# Allegro board K149H09_B1.2.brd
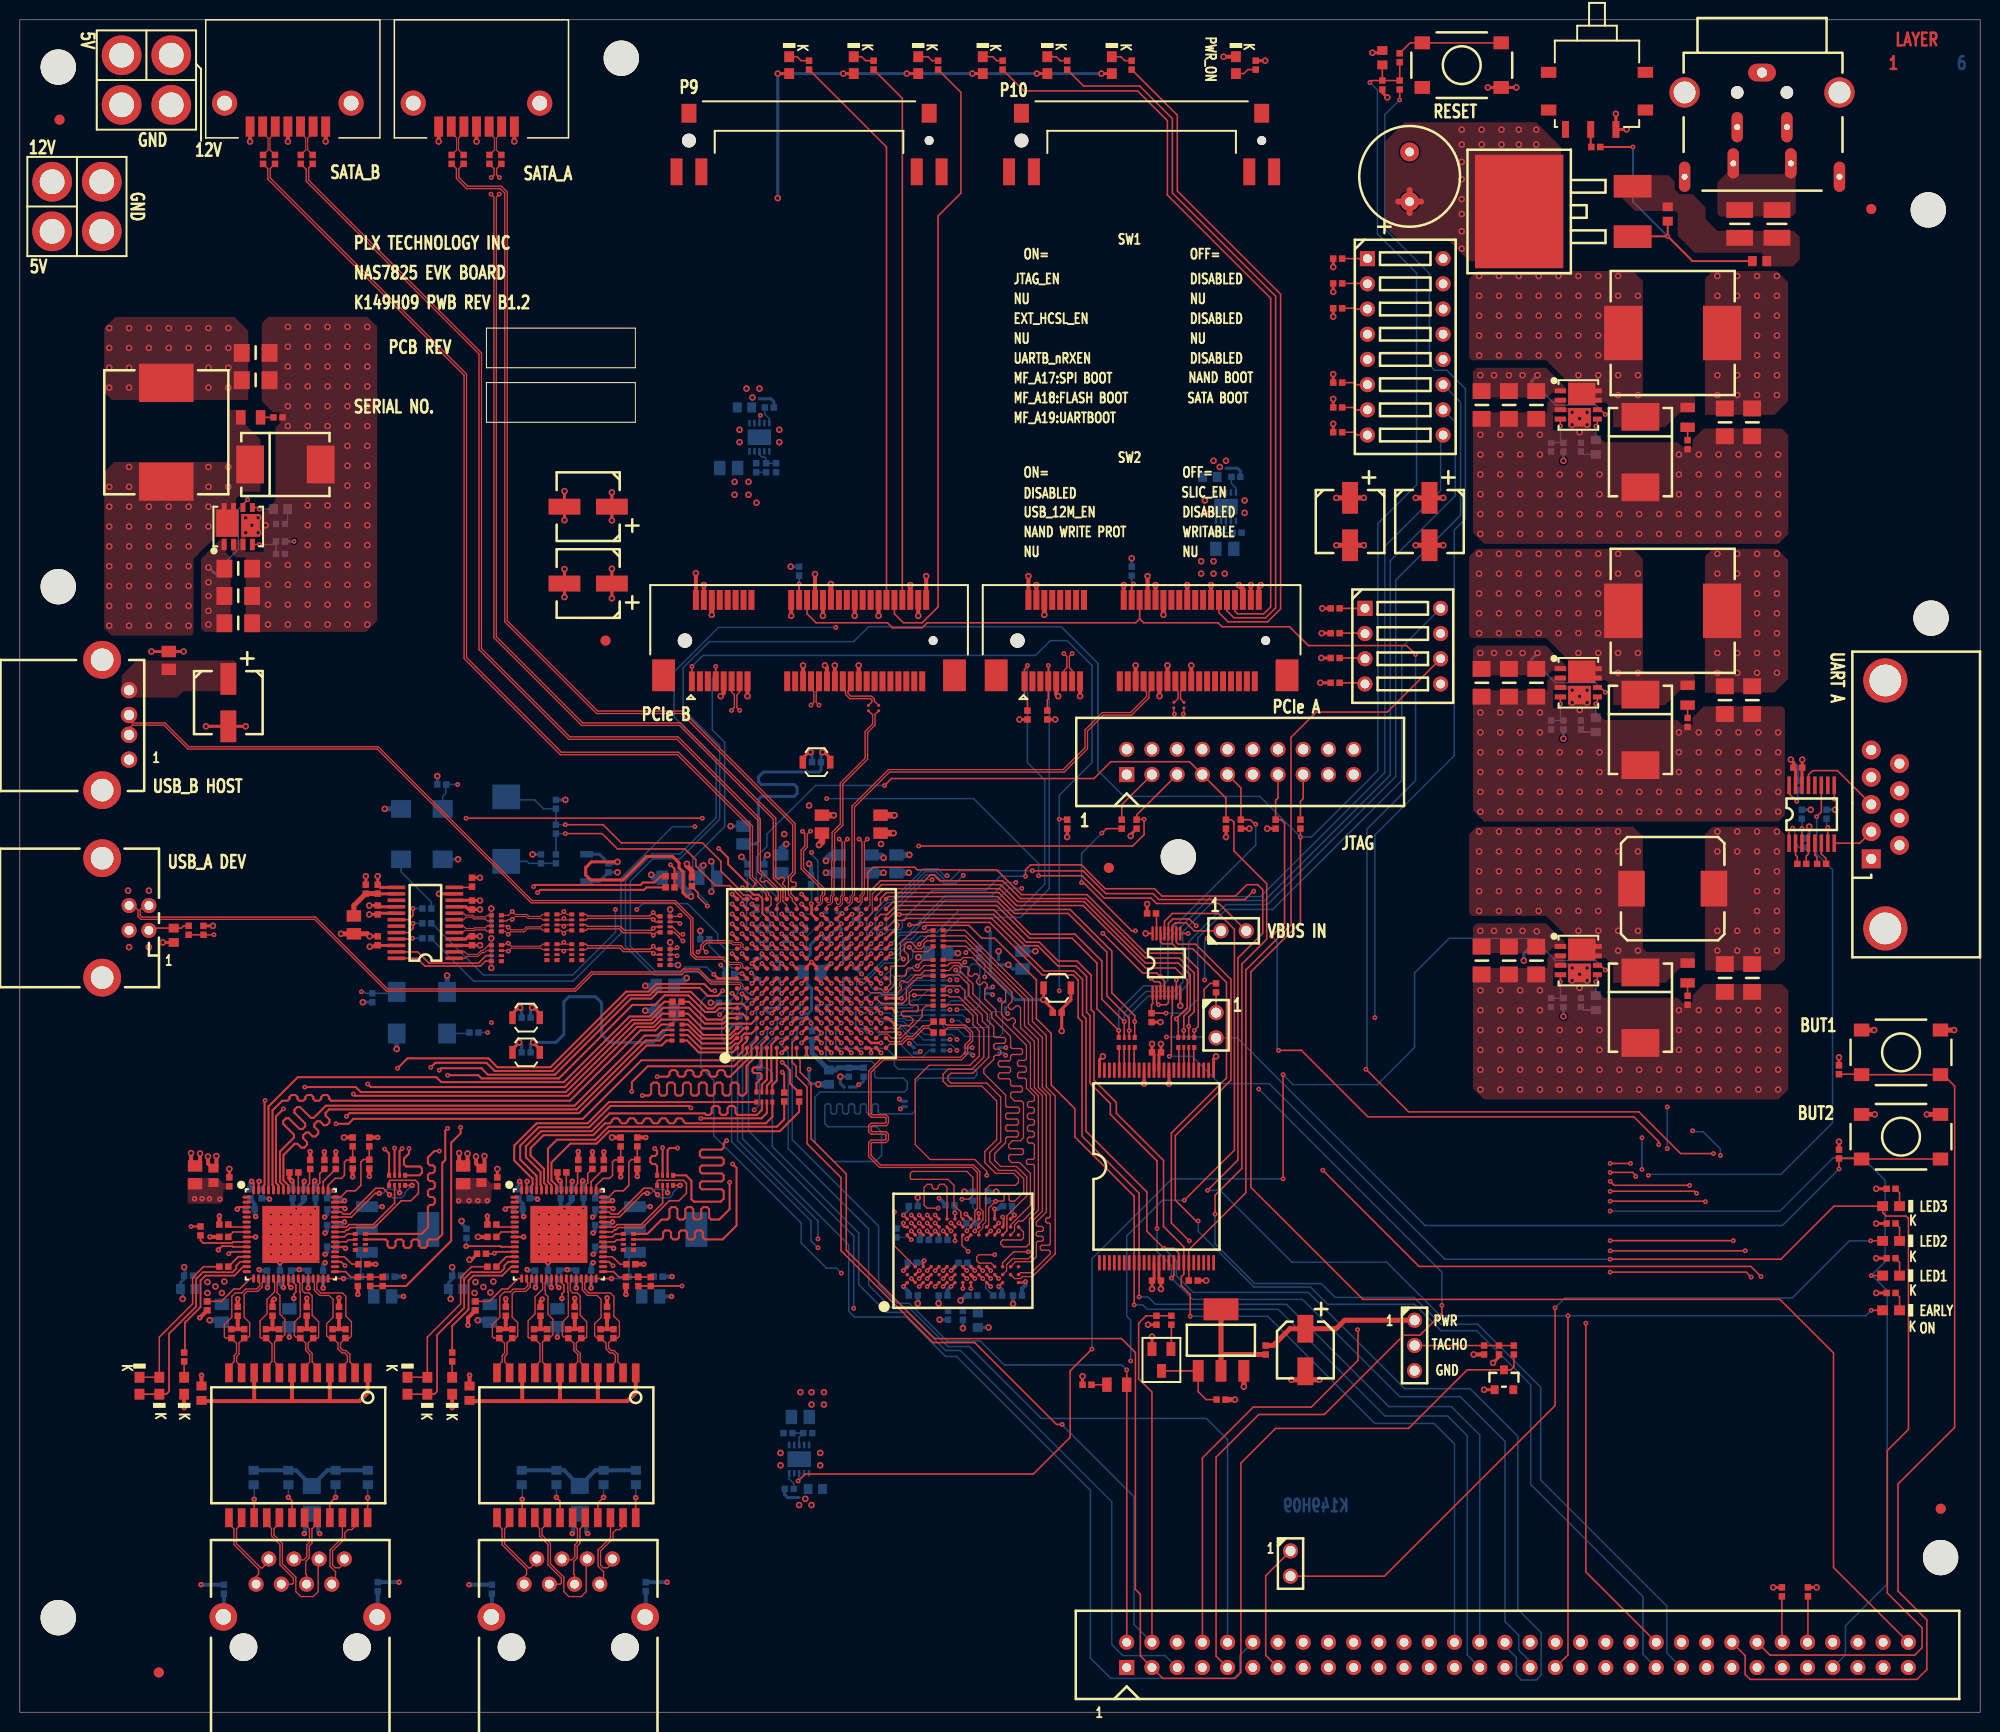
[diagram p0: board, top side]
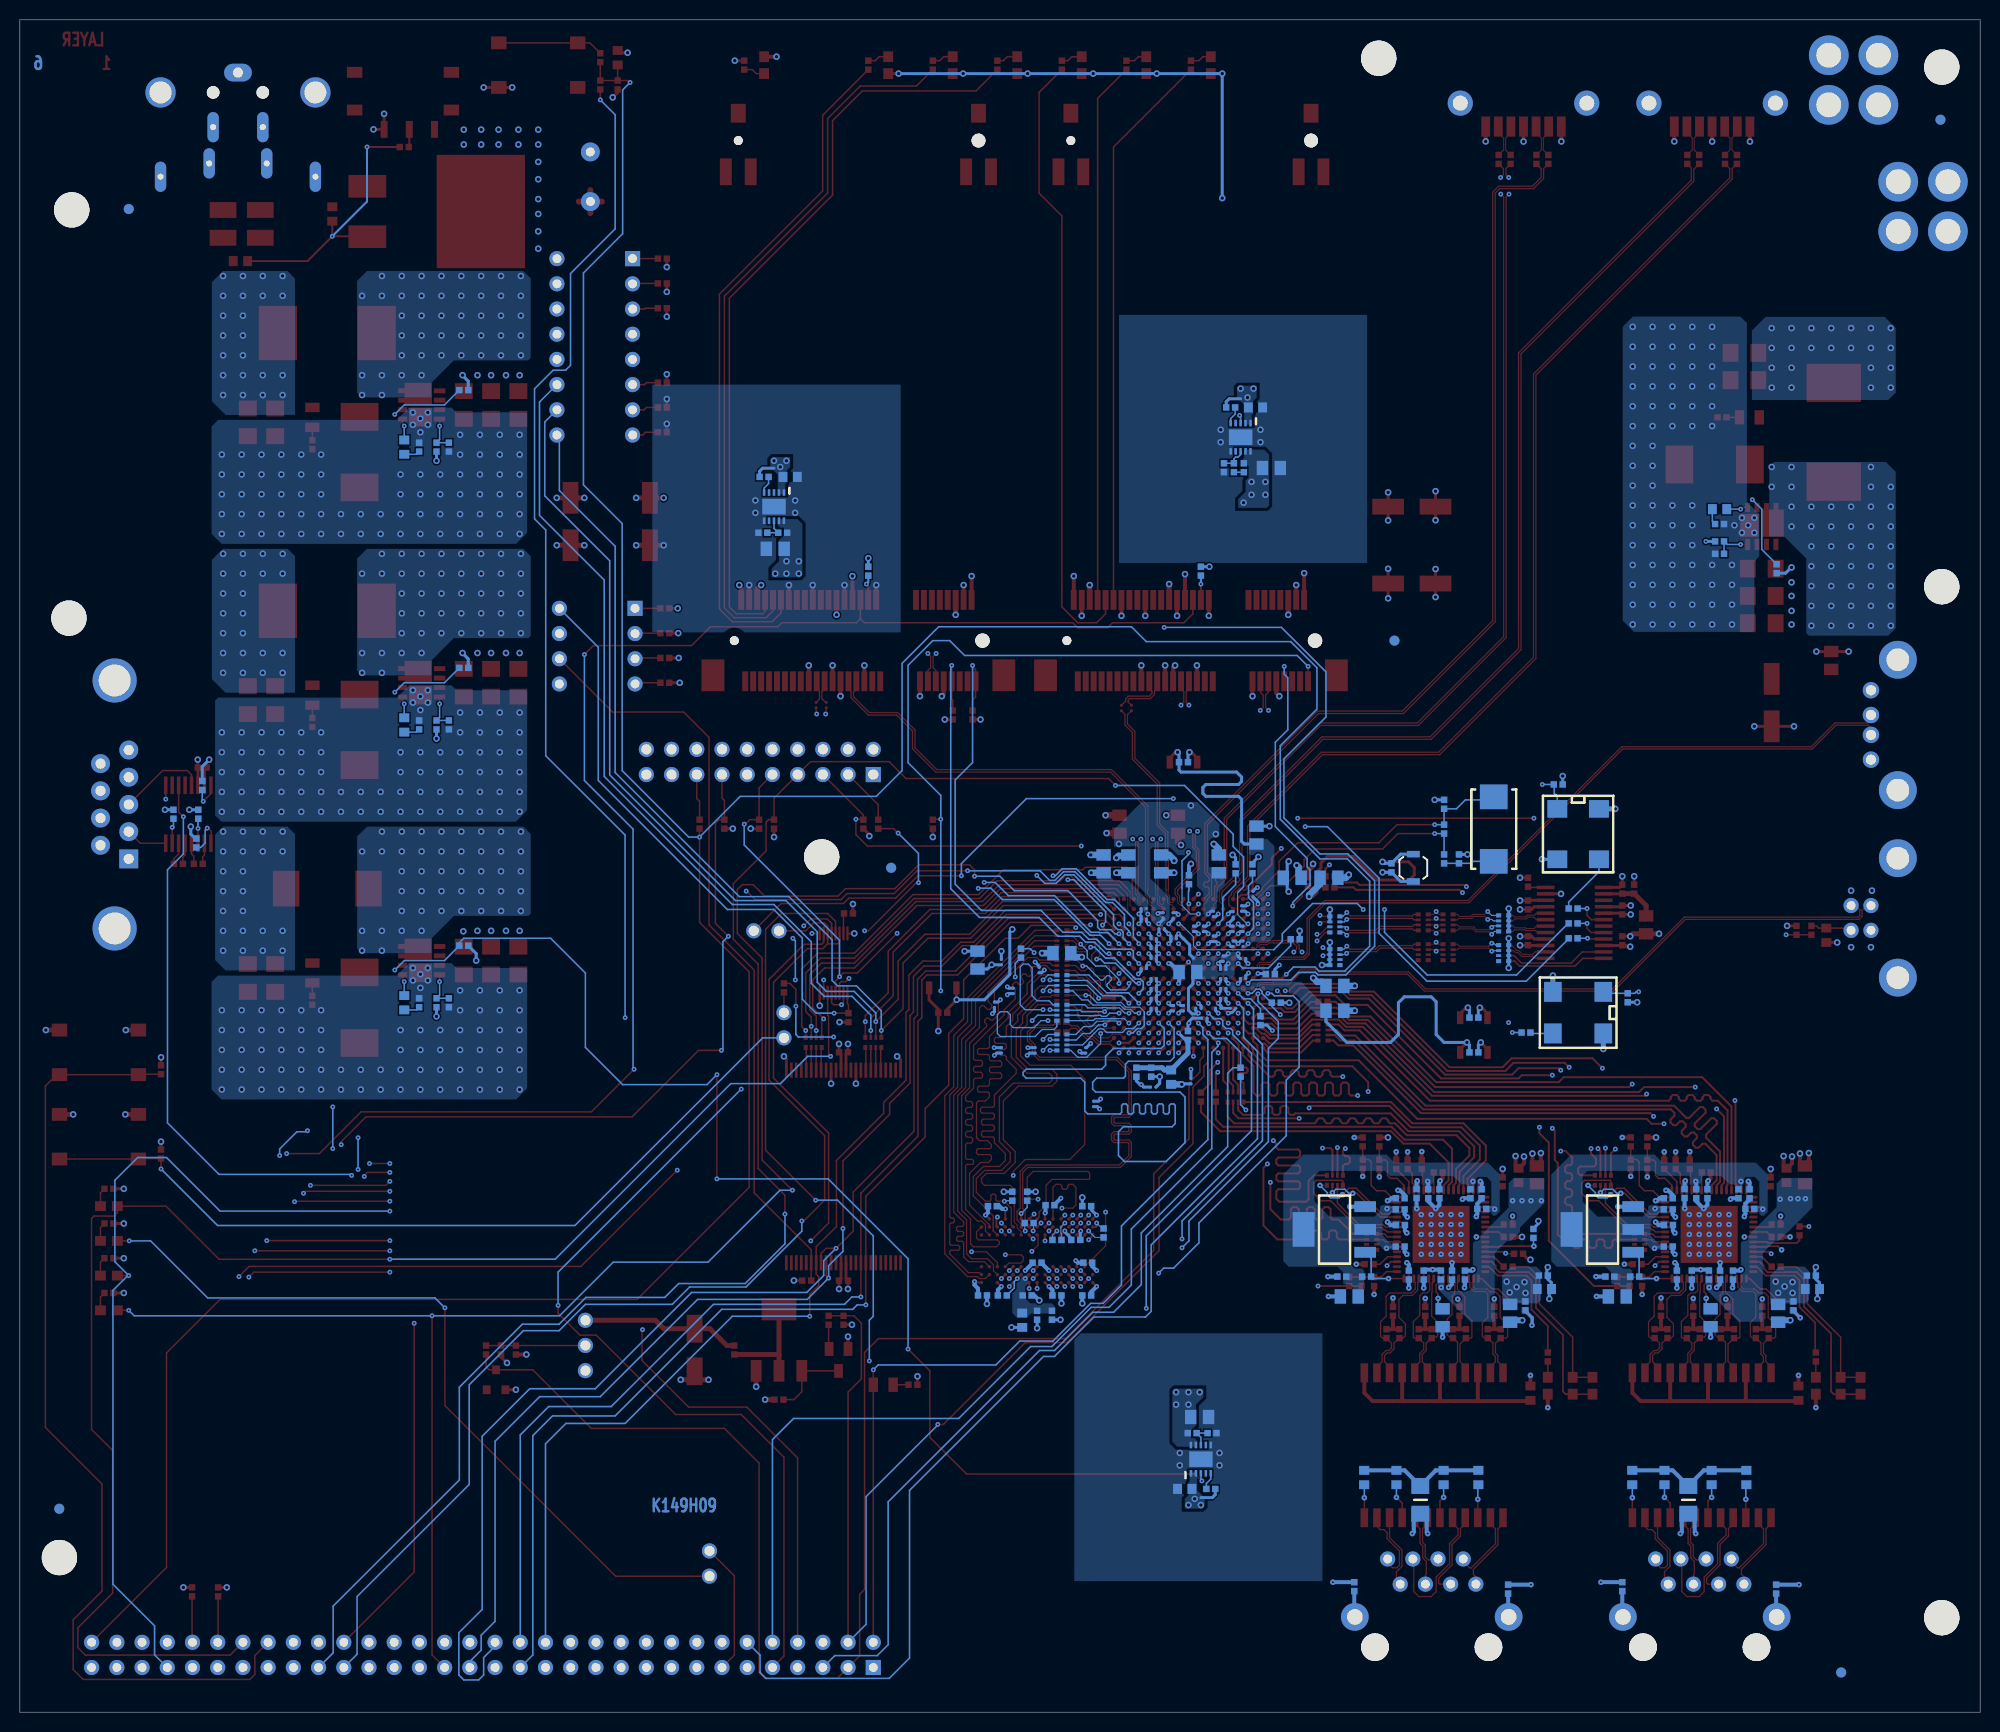
[diagram p1: board, bottom side, seen from below]

Outline 197.47 x 170.57 mm; copper layers: TOP, GNDPLANE-2, INNER-3, INNER-4, PWRPLANE-5, BOTTOM. Coordinates in mm from the lower left corner of the outline.
Outline path: 0,170.57 0,0 197.47,0 197.47,170.57 0,170.57

## Design rules (mm)
net group BMF_A5: nets BMF_A5 MF_A5
net group BMF_A11: nets BMF_A11 MF_A11
net group CLOCK_TO_STROBES: nets DDR2_NDQS0 DDR2_NDQS1
net group DDR2_A0: nets DDR2_A0 OXMEM_A0
net group DDR2_A1: nets DDR2_A1 OXMEM_A1
net group DDR2_A2: nets DDR2_A2 OXMEM_A2
net group DDR2_A3: nets DDR2_A3 OXMEM_A3
net group DDR2_A4: nets DDR2_A4 OXMEM_A4
net group DDR2_A5: nets DDR2_A5 OXMEM_A5
net group DDR2_A6: nets DDR2_A6 OXMEM_A6
net group DDR2_A7: nets DDR2_A7 OXMEM_A7
net group DDR2_A8: nets DDR2_A8 OXMEM_A8
net group DDR2_A9: nets DDR2_A9 OXMEM_A9
net group DDR2_A10: nets DDR2_A10 OXMEM_A10
net group DDR2_A11: nets DDR2_A11 OXMEM_A11
net group DDR2_A12: nets DDR2_A12 OXMEM_A12
net group DDR2_A13: nets DDR2_A13 OXMEM_A13
net group DDR2_BA0: nets DDR2_BA0 OXMEM_BA0
net group DDR2_BA1: nets DDR2_BA1 OXMEM_BA1
net group DDR2_BA2: nets DDR2_BA2 OXMEM_BA2
net group DDR2_CASN: nets DDR2_CASN OXMEM_CASN
net group DDR2_CK: nets DDR2_CK OXMEM_CK
net group DDR2_CKB: nets DDR2_CKB OXMEM_CKB
net group DDR2_CKE: nets DDR2_CKE OXMEM_CKE
net group DDR2_CSN: nets DDR2_CSN OXMEM_CSN
net group DDR2_ODT: nets DDR2_ODT OXMEM_ODT
net group DDR2_RASN: nets DDR2_RASN OXMEM_RASN
net group DDR2_WEN: nets DDR2_WEN OXMEM_WEN
net group DIFFPAIR0: nets PAIR0+_23232053 PAIR0-_23232050
net group DIFFPAIR1: nets PAIR1+_23232042 PAIR1-_23232040
net group DIFFPAIR2: nets PAIR2+_23232047 PAIR2-_23232046
net group DIFFPAIR3: nets PAIR3+_23232045 PAIR3-_23232044
net group DIFFPAIR4: nets CHANNEL_A+_23231895 CHANNEL_A-_23231897
net group DIFFPAIR5: nets CHANNEL_B+_23231809 CHANNEL_B-_23231722
net group DIFFPAIR6: nets CHANNEL_C+_23231861 CHANNEL_C-_23231857
net group DIFFPAIR7: nets CHANNEL_D+_23231823 CHANNEL_D-_23231810
net group DIFFPAIR8: nets PAIR0+ PAIR0-
net group DIFFPAIR9: nets PAIR1+ PAIR1-
net group DIFFPAIR10: nets PAIR2+ PAIR2-
net group DIFFPAIR11: nets PAIR3+ PAIR3-
net group DIFFPAIR12: nets CHANNEL_A+ CHANNEL_A-
net group DIFFPAIR13: nets CHANNEL_B+ CHANNEL_B-
net group DIFFPAIR14: nets CHANNEL_C+ CHANNEL_C-
net group DIFFPAIR15: nets CHANNEL_D+ CHANNEL_D-
net group DP_B_D: nets B_DM B_DP
net group DP_DA_D: nets DA_DM DA_DP
net group DP_PCIEA_PER: nets PCIEA_PERN0 PCIEA_PERP0
net group DP_PCIEB_PER: nets PCIEB_PERN0 PCIEB_PERP0
net group ETHA_25MHZ: nets ETHA_25MHZ N23439733
net group ETHA_TX_CTL: nets ETHA_TX_CTL N23439684
net group ETHA_TXC: nets ETHA_TXC N23439675
net group ETHA_TXD0: nets ETHA_TXD0 N23439882
net group ETHA_TXD1: nets ETHA_TXD1 N23439652
net group ETHA_TXD2: nets ETHA_TXD2 N23439663
net group ETHA_TXD3: nets ETHA_TXD3 N23439650
net group ETHB_TX_CTL: nets ETHB_TX_CTL N23439856
net group ETHB_TXC: nets ETHB_TXC N23439858
net group ETHB_TXD0: nets ETHB_TXD0 N23439641
net group ETHB_TXD1: nets ETHB_TXD1 N23439865
net group ETHB_TXD2: nets ETHB_TXD2 N23439863
net group ETHB_TXD3: nets ETHB_TXD3 N23439773
net group FAN_PWM: nets FAN_PWM N18234665
net group JTAG_NRST: nets JTAG_NRST N18750792
net group MDC: nets MDC MF_A3
net group N17700745: nets N17700745 N17765390
net group N17950406: nets N17950406 N17964845
net group N18234653: nets N18234653 N18234812
net group N19900220: nets N19900220 N19900222
net group N19900256: nets N19900256 N19900276
net group N140914361: nets N14091584 N140914361
net group N140916121: nets N14091668 N140916121
net group N140916441: nets N14091676 N140916441
net group N140959561: nets N14096104 N140959561
net group N140961321: nets N14096188 N140961321
net group N140961641: nets N14096196 N140961641
net group NAND_D0: nets N23258188 NAND_D0
net group NAND_D1: nets N23258192 NAND_D1
net group NAND_D2: nets N23258196 NAND_D2
net group NAND_D3: nets N23258202 NAND_D3
net group NAND_D4: nets N23258208 NAND_D4
net group NAND_D5: nets N23258218 NAND_D5
net group NAND_D6: nets N23258220 NAND_D6
net group NAND_D7: nets N23258029 NAND_D7
net group NRESET: nets N18750702 NRESET
net group PCIE_VDD3V3: nets N14091310 N14095822
net group PCIEA_PETN0: nets N13968763 PCIEA_PETN0
net group PCIEA_PETP0: nets N13968767 PCIEA_PETP0
net group PCIEB_PETN0: nets N13959877 PCIEB_PETN0
net group PCIEB_PETP0: nets N13964281 PCIEB_PETP0
net group RXN0: nets N17820092 RXN0
net group RXN1: nets N17820013 RXN1
net group RXP0: nets N17820094 RXP0
net group RXP1: nets N17820015 RXP1
net group TXN0: nets N17820090 TXN0
net group TXN1: nets N17820011 TXN1
net group TXP0: nets N17820088 TXP0
net group TXP1: nets N17820009 TXP1
net group VBUS_IN: nets N17671158 VBUS_IN
net group N13931481: nets N13931481 N14036210 N14092670 N17923256 N22858587
net group N13931745: nets N13931745 N14036589 N14092678 N17923258 N22856740
net group N18247031: nets N18247031 N18247049 N18252801
net group PCIEA_REFCLKN: nets N14041873 N14092662 N17923346 N22853060 PCIEA_REFCLKN
net group PCIEA_REFCLKP: nets N14041486 N14048913 N17923344 N22853977 PCIEA_REFCLKP
net group PCIEB_REFCLKN: nets N14041101 N14092658 N17923342 N22854896 PCIEB_REFCLKN
net group PCIEB_REFCLKP: nets N14040718 N14092674 N17923328 N22855817 PCIEB_REFCLKP
net group RPD_DDR_DQ_H: nets DDR2_DM1 DDR2_DQ8 DDR2_DQ9 DDR2_DQ10 DDR2_DQ11 DDR2_DQ12 DDR2_DQ13 DDR2_DQ14 DDR2_DQ15 DDR2_PDQS1
net group RPD_DDR_DQ_L: nets DDR2_DM0 DDR2_DQ0 DDR2_DQ1 DDR2_DQ2 DDR2_DQ3 DDR2_DQ4 DDR2_DQ5 DDR2_DQ6 DDR2_DQ7 DDR2_PDQS0
net group RPD_ETHA: nets ETHA_RX_CTL ETHA_RXC ETHA_RXD0 ETHA_RXD1 ETHA_RXD2 ETHA_RXD3
net group RPD_ETHB: nets ETHB_RX_CTL ETHB_RXC ETHB_RXD0 ETHB_RXD1 ETHB_RXD2 ETHB_RXD3
net group USB_VDD2V5_F: nets USB_VDD2V5_F

## Placement (name value [footprint] x y rotation side)
C1  CAP_CER_0805  [L2051]  65 73.2 180 bottom
C2  CAP_CER_0201_round  [L2058]  74.25 73.95 0 bottom
C3  CAP_CER_0805  [L2051]  65.6 84.1 180 bottom
C4  CAP_CER_0201_round  [L2058]  75.25 80.4 90 bottom
C5  CAP_CER_0201_round  [L2058]  76.25 73.95 180 bottom
C6  CAP_CER_0805  [L2051]  88.3 85.5 90 bottom
C7  CAP_CER_0201_round  [L2058]  84.25 81 180 bottom
C8  CAP_CER_0805  [L2051]  65 70.7 180 bottom
C9  CAP_CER_0201_round  [L2058]  76.25 74.85 180 bottom
C10  CAP_CER_0201_round  [L2058]  84.25 79.95 180 bottom
C11  CAP_CER_0201_round  [L2058]  78.25 78.95 90 bottom
C12  CAP_CER_0201_round  [L2058]  81.3 80.3 270 bottom
C13  CAP_CER_0201_round  [L2058]  74.25 75.95 0 bottom
C14  CAP_CER_0201_round  [L2058]  75.25 78.95 270 bottom
C15  CAP_CER_0201_round  [L2058]  75.25 70.95 180 bottom
C16  CAP_CER_0201_round  [L2058]  76.25 72.95 180 bottom
C17  CAP_CER_0201_round  [L2058]  76.25 75.95 90 bottom
C18  CAP_CER_0201_round  [L2058]  77.25 77.95 90 bottom
C19  CAP_CER_0201_round  [L2058]  83.25 72.95 0 bottom
C20  CAP_CER_0201_round  [L2058]  82.45 78.95 0 bottom
C21  CAP_CER_0201_round  [L2058]  81.25 77.95 180 bottom
C22  CAP_CER_0201_round  [L2058]  83.25 76.95 0 bottom
C23  CAP_CER_0201_round  [L2058]  84.25 74.95 180 bottom
C24  CAP_CER_0201_round  [L2058]  81.25 70.95 270 bottom
C25  CAP_CER_0201_round  [L2058]  78.75 70.95 0 bottom
C26  CAP_CER_0201_round  [L2058]  73.25 82.45 270 bottom
C27  CAP_CER_0201_round  [L2058]  74.25 77.45 270 bottom
C30  CAP_CER_0201_round  [L2058]  75.25 77.45 270 bottom
C31  CAP_CER_0201_round  [L2058]  74.25 78.95 90 bottom
C32  CAP_CER_0201_round  [L2058]  74.4 81 90 bottom
C33  CAP_CER_0201_round  [L2058]  76.25 71.95 180 bottom
C34  CAP_CER_0201_round  [L2058]  79.25 78.95 90 bottom
C35  CAP_CER_0201_round  [L2058]  83.25 77.95 0 bottom
C36  CAP_CER_0201_round  [L2058]  83.25 75.95 0 bottom
C37  CAP_CER_0201_round  [L2058]  76.75 70.95 0 bottom
C38  CAP_CER_0201_round  [L2058]  77.25 80.45 90 bottom
C39  CAP_CER_0201_round  [L2058]  82.3 80.3 270 bottom
C40  CAP_CER_0201_round  [L2058]  78.15 69.95 180 bottom
C41  CAP_CER_0201_round  [L2058]  83.25 73.95 0 bottom
C42  CAP_CER_0201_round  [L2058]  83.25 71.95 0 bottom
C43  CAP_CER_0201_round  [L2058]  83.25 70.95 180 bottom
C44  CAP_CER_0201_round  [L2058]  80.25 70.95 270 bottom
C45  CAP_CER_0201_round  [L2058]  116.24 101.5 90 top
C46  CAP_CER_0201_round  [L2058]  117.26 101.5 90 top
C47  CAP_CER_0201_round  [L2058]  85.49 101.2 90 top
C48  CAP_CER_0201_round  [L2058]  86.51 101.2 90 top
C49  CAP_CER_0805  [L2051]  33.65 79.35 90 top
C50  CAP_CER_0402s  [L1077C]  36.05 82.95 270 top
C51  CAP_CER_0402s  [L1077C]  36.05 80.85 270 top
C52  CAP_CER_0402s  [L1077C]  45.55 77.75 90 top
C53  CAP_CER_0402s  [L1077C]  45.55 81.35 90 top
C56  CAP_CER_0603s  [L2050C]  15.5 78.3 90 top
C60  CAP_CER_0402s  [L1077C]  43.5 156.5 90 top
C61  CAP_CER_0402s  [L1077C]  44.7 156.5 90 top
C62  CAP_CER_0402s  [L1077C]  47.3 156.5 90 top
C63  CAP_CER_0402s  [L1077C]  48.5 156.5 90 top
C64  CAP_CER_0402s  [L1077C]  25.7 156.5 90 top
C65  CAP_CER_0402s  [L1077C]  24.5 156.5 90 top
C66  CAP_CER_0402s  [L1077C]  29.5 156.5 90 top
C67  CAP_CER_0402s  [L1077C]  28.3 156.5 90 top
C68  CAP_CER_0402s  [L1077C]  95 45.3 180 bottom
C69  CAP_CER_0402s  [L1077C]  90 51 180 bottom
C70  CAP_CER_0402s  [L1077C]  99.5 51 180 bottom
C71  CAP_CER_0402s  [L1077C]  93.7 51.1 0 bottom
C72  CAP_CER_0402s  [L1077C]  91.1 47.6 180 bottom
C73  CAP_CER_0402s  [L1077C]  89.9 45.3 0 bottom
C74  CAP_CER_0402s  [L1077C]  93 42 0 bottom
C75  CAP_CER_0402s  [L1077C]  90 42 180 bottom
C76  CAP_CER_0402s  [L1077C]  100.5 42 0 bottom
C77  CAP_CER_0402s  [L1077C]  96 42 0 bottom
C78  CAP_CER_0603s  [L2050C]  96.5 39.5 90 bottom
C79  CAP_CER_0402s  [L1077C]  79.8 68.2 270 bottom
C80  CAP_CER_0603s  [L2050C]  81.5 64 90 bottom
C82  CAP_CER_0402s  [L1077C]  54 91.5 270 bottom
C83  CAP_CER_0402s  [L1077C]  52.5 86 270 bottom
C85  CAP_CER_0402s  [L1077C]  114.5 43.5 180 top
C86  CAP_CER_0402s  [L1077C]  114.5 66.5 180 top
C88  CAP_POL__SMT_PANASONIC_CASE_C  [L2124]  129.5 36.5 270 top
C91  CAP_CER_0402s  [L1077C]  107.5 33 0 top
C95  CAP_CER_0402s  [L1077C]  179.1 95.2 180 top
C96  CAP_CER_0402s  [L1077C]  179.5 85.5 0 top
C97  CAP_CER_0402s  [L1077C]  179.5 90.5 270 bottom
C98  CAP_CER_0402s  [L1077C]  182 90.5 270 bottom
C99  CAP_CER_0402s  [L1077C]  181.5 85.5 0 top
C102  CAP_CER_0603s  [L2050C]  158.75 127.5 90 bottom
C111  0805  [L2051]  71.4 125.4 0 bottom
C114  CAP_CER_0603s  [L2050C]  73 131.5 0 bottom
C117  0805  [L2051]  78.62 29.75 0 bottom
C119  CAP_CER_0603s  [L2050C]  80.12 22.5 180 bottom
C122  CAP_CER_0805  [L2051]  82.5 85.5 90 bottom
C123  CAP_CER_0805  [L2051]  92.5 76.5 0 bottom
C124  CAP_CER_0805  [L2051]  76.7 85.5 90 bottom
C125  CAP_CER_0805  [L2051]  85.8 85.5 90 bottom
C126  CAP_CER_0603s  [L2050C]  137.25 166.75 270 top
C127  CAP_CER_0402s  [L1077C]  36.05 77.75 270 top
C128  CAP_CER_0805  [L2051]  72.9 88.4 90 bottom
C129  CAP_CER_0805  [L2051]  69.3 84.1 180 bottom
C130  CAP_CER_0805  [L2051]  80.8 89.5 90 top
C131  CAP_CER_0805  [L2051]  86.7 89.5 270 top
C132  CAP_CER_0805  [L2051]  101 75.8 90 bottom
C133  CAP_CER_0805  [L2051]  79.8 74.6 0 bottom
C134  CAP_CER_0201_round  [L2058]  79.5 63.6 90 bottom
C135  CAP_CER_0201_round  [L2058]  90.1 66.7 270 bottom
C136  CAP_CER_0201_round  [L2058]  98.6 66.7 90 bottom
C137  CAP_CER_0201_round  [L2058]  83.3 63 0 bottom
C138  CAP_CER_0201_round  [L2058]  94.8 74.8 270 bottom
C139  CAP_CER_0201_round  [L2058]  97.4 72.7 90 bottom
C140  CAP_CER_0201_round  [L2058]  95.2 66.7 90 bottom
C141  CAP_CER_0201_round  [L2058]  98.6 75.6 270 bottom
C142  CAP_CER_0201_round  [L2058]  89.3 61.3 90 bottom
C143  CAP_CER_0201_round  [L2058]  99.3 71.3 90 bottom
C144  CAP_CER_0402s  [L1077C]  36.55 43.4 270 top
C145  CAP_CER_0402s  [L1077C]  32.15 40.4 90 top
C146  CAP_CER_0402s  [L1077C]  28.9 40.4 90 top
C147  CAP_CER_0805  [L2051]  27.15 39.75 90 bottom
C148  CAP_CER_0402s  [L1077C]  20.55 12.4 270 bottom
C149  CAP_CER_0402s  [L1077C]  36.05 12.65 270 bottom
C150  CAP_CER_1206  [L2052]  29.4 21.4 90 bottom
C151  CAP_CER_0402s  [L1077C]  21.95 40.4 270 top
C152  CAP_CER_0402s  [L1077C]  25.45 40.4 270 top
C153  CAP_CER_0402s  [L1077C]  31.43 46.92 0 bottom
C154  CAP_CER_0402s  [L1077C]  31.43 50.67 0 bottom
C155  CAP_CER_0402s  [L1077C]  28.6 52.25 90 bottom
C156  CAP_CER_0402s  [L1077C]  24.35 52.25 90 bottom
C157  CAP_CER_0402s  [L1077C]  23.2 50.73 180 bottom
C158  CAP_CER_0402s  [L1077C]  34.8 43.9 180 bottom
C159  CAP_CER_0402s  [L1077C]  31.4 49.1 0 bottom
C160  CAP_CER_0402s  [L1077C]  31.43 51.8 0 bottom
C161  CAP_CER_0402s  [L1077C]  29.77 52.27 90 bottom
C162  CAP_CER_0402s  [L1077C]  27.48 52.25 90 bottom
C163  CAP_CER_0402s  [L1077C]  23.23 52.25 90 bottom
C164  CAP_CER_0805  [L2051]  36.55 41.9 180 bottom
C165  CAP_CER_0402s  [L1077C]  37.3 43.9 180 bottom
C166  CAP_CER_0402s  [L1077C]  30.55 44.05 270 bottom
C167  CAP_CER_0402s  [L1077C]  29.05 44.05 270 bottom
C168  CAP_CER_0402s  [L1077C]  26.2 44.05 270 bottom
C169  CAP_CER_0402s  [L1077C]  24.9 44.05 270 bottom
C170  CAP_CER_0402s  [L1077C]  27.32 44.05 270 bottom
C171  CAP_CER_0805  [L2051]  17.65 54.15 90 top
C172  CAP_CER_0805  [L2051]  20.35 40.2 90 bottom
C173  CAP_CER_0402s  [L1077C]  18.8 40.95 90 bottom
C174  CAP_CER_0402s  [L1077C]  63.55 43.4 270 top
C175  CAP_CER_0402s  [L1077C]  59.15 40.4 90 top
C176  CAP_CER_0402s  [L1077C]  55.9 40.4 90 top
C177  CAP_CER_0805  [L2051]  54.15 39.75 90 bottom
C178  CAP_CER_0402s  [L1077C]  47.55 12.4 270 bottom
C179  CAP_CER_0402s  [L1077C]  63.05 12.65 270 bottom
C180  CAP_CER_1206  [L2052]  56.4 21.4 90 bottom
C181  CAP_CER_0402s  [L1077C]  48.95 40.4 270 top
C182  CAP_CER_0402s  [L1077C]  52.45 40.4 270 top
C183  CAP_CER_0402s  [L1077C]  58.42 46.92 0 bottom
C184  CAP_CER_0402s  [L1077C]  58.42 50.67 0 bottom
C185  CAP_CER_0402s  [L1077C]  55.6 52.25 90 bottom
C186  CAP_CER_0402s  [L1077C]  51.35 52.25 90 bottom
C187  CAP_CER_0402s  [L1077C]  50.2 50.73 180 bottom
C188  CAP_CER_0402s  [L1077C]  61.8 43.9 180 bottom
C189  CAP_CER_0805  [L2051]  63.55 41.9 180 bottom
C190  CAP_CER_0402s  [L1077C]  64.3 43.9 180 bottom
C191  CAP_CER_0402s  [L1077C]  58.4 49.1 0 bottom
C192  CAP_CER_0402s  [L1077C]  58.42 51.8 0 bottom
C193  CAP_CER_0402s  [L1077C]  56.77 52.27 90 bottom
C194  CAP_CER_0402s  [L1077C]  54.48 52.25 90 bottom
C195  CAP_CER_0402s  [L1077C]  50.23 52.25 90 bottom
C196  CAP_CER_0805  [L2051]  44.65 54.15 90 top
C197  CAP_CER_0402s  [L1077C]  57.55 44.05 270 bottom
C198  CAP_CER_0402s  [L1077C]  56.05 44.05 270 bottom
C199  CAP_CER_0402s  [L1077C]  53.2 44.05 270 bottom
C200  CAP_CER_0402s  [L1077C]  51.9 44.05 270 bottom
C201  CAP_CER_0402s  [L1077C]  54.33 44.05 270 bottom
C202  CAP_CER_0805  [L2051]  47.35 40.2 90 bottom
C203  CAP_CER_0402s  [L1077C]  45.8 40.95 90 bottom
C204  D8 Case  [L2117A]  142 120 270 top
C205  D8 Case  [L2117A]  134 120 270 top
C206  D8 Case  [L2117A]  57.25 121.5 180 top
C207  D8 Case  [L2117A]  57.25 113.75 180 top
C208  CAP_POL_SMT_PANASONIC_HC_D8  [L2117A]  21 101.75 270 top
C209  CAP_CER_0603s  [L2050C]  175.25 146.25 0 top
C210  1206  [L2052]  147.25 103.75 90 top
C211  1206  [L2052]  150 103.75 90 top
C212  1206  [L2052]  152.75 103.75 90 top
C213  CAP_POL_RAD_PD100LP050LD06  [L2120A]  140 152.25 90 top
C214  1206  [L2052]  171.75 102 90 top
C215  1206  [L2052]  174.5 102 90 top
C216  CAP_CER_0603s  [L2050C]  158.75 99.5 90 bottom
C217  1206  [L2052]  22 109.75 180 top
C218  1206  [L2052]  22 112.5 180 top
C219  1206  [L2052]  22 115.25 180 top
C220  1206  [L2052]  147.25 75.75 90 top
C221  1206  [L2052]  150 75.75 90 top
C222  1206  [L2052]  152.75 75.75 90 top
C223  1206  [L2052]  23.75 134.25 180 top
C224  1206  [L2052]  23.75 137 180 top
C225  1206  [L2052]  171.75 74 90 top
C226  1206  [L2052]  174.5 74 90 top
C227  CAP_CER_0603s  [L2050C]  26.25 121.25 180 bottom
C228  CAP_CER_0603s  [L2050C]  158.75 71.5 90 bottom
C229  1206  [L2052]  147.25 131.75 90 top
C230  1206  [L2052]  150 131.75 90 top
C231  1206  [L2052]  152.75 131.75 90 top
C232  1206  [L2052]  171.75 130 90 top
C233  1206  [L2052]  174.5 130 90 top
C234  0805  [L2051]  121.38 117.25 180 bottom
C235  CAP_CER_0603s  [L2050C]  119.88 124.5 0 bottom
C236  CAP_CER_0402s  [L1077C]  168 99.75 90 top
C237  CAP_CER_0402s  [L1077C]  26 130.5 180 top
C238  CAP_CER_0402s  [L1077C]  168 71.75 90 top
C239  CAP_CER_0402s  [L1077C]  168 127.75 90 top
CONN1  SATA_STD_Molex_67490_1220  [L7473RA]  46 159.81 180 top
CONN2  SATA_STD_Molex_67490_1220  [L7473RA]  27 159.81 180 top
D1  LED_CHIP_SMT_0603_KP1608  [L3631C]  77.5 166 90 top
D2  LED_CHIP_SMT_0603_KP1608  [L3631C]  84 166 90 top
D3  LED_CHIP_SMT_0603_KP1608  [L3631C]  90.5 166 90 top
D4  LED_CHIP_SMT_0603_KP1608  [L3631C]  97 166 90 top
D5  LED_CHIP_SMT_0603_KP1608  [L3631C]  103.5 166 90 top
D6  LED_CHIP_SMT_0603_KP1608  [L3631C]  110 166 90 top
D9  LED_CHIP_SMT_0603_KP1608  [L3631C]  188.5 40.5 0 top
D10  LED_CHIP_SMT_0603_KP1608  [L3631C]  188.5 44 0 top
D11  LED_CHIP_SMT_0603_KP1608  [L3631C]  188.5 47.5 0 top
D12  LED_CHIP_SMT_0603_KP1608  [L3631C]  188.5 51 0 top
D13  LED_CHIP_SMT_0603_KP1608  [L3631C]  122.5 166 90 top
D14  BZX84C3V3_SOT23  [L3790G]  149.5 33.5 180 top
D15  LED_CHIP_SMT_0603_KP1608  [L3631C]  16.55 32.9 270 top
D16  LED_CHIP_SMT_0603_KP1608  [L3631C]  12.05 32.9 90 top
D17  LED_CHIP_SMT_0603_KP1608  [L3631C]  14.05 32.9 270 top
D18  LED_CHIP_SMT_0603_KP1608  [L3631C]  43.55 32.9 270 top
D19  LED_CHIP_SMT_0603_KP1608  [L3631C]  39.05 32.9 90 top
D20  LED_CHIP_SMT_0603_KP1608  [L3631C]  41.05 32.9 270 top
D21  5A 40V -SMC  [L3552D]  163.25 99 270 top
D22  5A 40V -SMC  [L3552D]  26.75 125.75 0 top
D23  5A 40V -SMC  [L3552D]  163.25 71 270 top
D24  5A 40V -SMC  [L3552D]  163.25 127 270 top
F1  Fuse  [L2051]  15 106 270 top
FB1  FERRITE_SMT_0603  [L4598]  18.3 32.15 270 top
FB2  FERRITE_SMT_0603  [L4598]  19.5 54.1 270 top
FB3  FERRITE_SMT_0603  [L4598]  16.9 42.65 0 bottom
FB4  FERRITE_SMT_0603  [L4598]  45.3 32.15 270 top
FB5  FERRITE_SMT_0603  [L4598]  46.5 54.1 270 top
FB6  FERRITE_SMT_0603  [L4598]  43.9 42.65 180 bottom
FID1  -  [ALS_FID]  4 160.5 0 top
FID2  -  [ALS_FID]  186.5 151.5 0 top
FID3  -  [ALS_FID]  14 4 0 top
FID4  -  [ALS_FID]  193.5 20.5 0 top
FID5  -  [ALS_FID]  109.7 85.1 0 top
FID6  -  [ALS_FID]  59 108 0 top
FID7  -  [ALS_FID]  59 108 180 bottom
FID8  -  [ALS_FID]  109.7 85.1 180 bottom
FID9  -  [ALS_FID]  193.5 20.5 180 bottom
FID10  -  [ALS_FID]  14 4 180 bottom
FID11  -  [ALS_FID]  186.5 151.5 180 bottom
FID12  -  [ALS_FID]  4 160.5 180 bottom
HD3  2.54mm 32x2 Header strip  [L8079A]  111.5 4.5 0 top
HD4  FAN TACHO  [L8019]  140.5 39.5 0 top
HD5  Header 10x2 TH Shrouded  [L8072A]  111.5 94.5 0 top
HD6  Kycon_KPJX_4S_S_PowerConn  [L7651A]  173 159.75 180 top
IC1  NAS7825  [L0414]  79.75 74.45 0 top
IC2  ICS841S04I  [L0563]  40.85 79.55 90 top
IC5  DDR2_2Gb_16Mx16x8_84FBGA  [L0363C]  95 46.5 90 top
IC7  SN74CB3T3257  [L0808]  115.5 75.5 0 top
IC11  MT29F1G08AACWP  [L0571]  114.5 55 0 top
IC15  ISL83220ECVZ  [L0598]  180.5 90.5 0 top
IC16  IP1001  [L0680E]  27.3 48.15 0 top
IC17  IP1001  [L0680E]  54.3 48.15 0 top
IC18  AOZ1014D  [L0107]  157 103.75 270 top
IC19  AOZ1014D  [L0107]  22 119.5 0 top
IC20  AOZ1014D  [L0107]  157 75.75 270 top
IC21  AOZ1014D  [L0107]  157 131.75 270 top
IC22  AP7165  [L0873]  74.5 128.5 270 bottom
IC23  AP7167  [L0873]  78.5 25.5 90 bottom
IC24  AP7167  [L0873]  121.5 121.5 270 bottom
JP1  JUMPER  [L8014]  121 78.75 90 top
JP2  JUMPER  [L8014]  128 16.25 0 top
JP3  JUMPER  [L8014]  120.5 70.5 0 top
L1  IND_WURTH_WE_TPC_T  [L4878]  104.5 73 270 top
L2  IND_WURTH_WE_TPC_T  [L4878]  51 70 90 top
L3  IND_WURTH_WE_TPC_T  [L4878]  57.1 85.1 0 bottom
L4  IND_WURTH_WE_TPC_T  [L4878]  51 66.5 90 top
L5  IND_WURTH_WE_TPC_T  [L4878]  80.25 95.75 90 top
L6  IND_COILTRONICS_DR127  [L4824]  166.5 111 0 top
L7  IND_COILTRONICS_DR127  [L4824]  14.75 129 90 top
L8  IND_SMT_EPCOS_B82464Z4xxxx  [L4819]  166.5 83 180 top
L9  IND_COILTRONICS_DR127  [L4824]  166.5 139 0 top
MAG1  H5007  [L4139]  28.05 26.9 180 top
MAG2  H5007  [L4139]  55.05 26.9 180 top
NOREF  -  [unnamed]  192.25 151.41 0 top
NOREF#2  -  [#2]  0 0 90 top
NOREF#3  -  [unnamed]  60.59 166.7 0 top
NOREF#4  -  [#2]  242.25 -63.25 0 top
NOREF#5  -  [#2]  0 0 0 top
NOREF#6  -  [unnamed]  116.7 86.2 0 top
NOREF#7  -  [unnamed]  3.87 9.52 0 top
NOREF#8  -  [#2]  10 20 90 top
NOREF#9  -  [#2]  187.2 -7.6 0 top
NOREF#10  -  [#2]  0 0 90 top
NOREF#11  -  [unnamed#3]  113 158.4 0 top
NOREF#12  -  [unnamed]  3.87 165.81 0 top
NOREF#13  -  [unnamed]  193.49 15.58 0 top
NOREF#14  -  [#2]  0 0 0 top
NOREF#15  -  [#2]  65 -45.5 0 top
NOREF#16  -  [#2]  -101.9 -108.9 0 top
NOREF#17  -  [#2]  211.3 171.3 0 top
NOREF#18  -  [#2]  15.5 -7.3 0 top
NOREF#19  -  [unnamed]  3.87 113.44 0 top
NOREF#20  -  [unnamed]  192.53 110.27 0 top
NOREF#21  -  [#2]  14.5 179.5 0 top
NOREF#22  -  [unnamed#3]  79.5 158.4 0 top
NOREF#23  -  [#2]  10 20 0 top
OSC1  7mmx5mmosc_b  [L3008]  40.5 88.5 270 bottom
OSC2  7mmx5mmosc_b  [L3008]  40.5 70.5 0 bottom
P1  PCI_EXPRESS_MINI_x1  [L8961G]  79.5 108 0 top
P2  PCI_EXPRESS_MINI_x1  [L8961G]  113 108 0 top
P3  USB type B  [L8294]  13 78.8 0 top
P5  USB type A  [L8794S]  11 103 270 top
P7  DSUB9 - M - US  [L8133A]  186.5 86 90 top
P11  3012S  [L7003D1]  23.8 12.9 0 top
P12  3012S  [L7003D1]  50.8 12.9 0 top
PWR1  Power Lead  [L9659]  15.25 167 180 top
PWR2  Power Lead  [L9659]  3.25 154.25 270 top
R1  Res_0402  [L1077C]  51 70 0 bottom
R2  Res_0402  [L1077C]  59.3 85.1 90 bottom
R3  Res_0402  [L1077C]  104.5 70.5 180 top
R4  Res_0402  [L1077C]  51 66.5 0 bottom
R5  Res_0402  [L1077C]  65.5 84.25 180 top
R6  Res_0402  [L1077C]  66.2 70.4 180 top
R7  Res_0402  [L1077C]  66.2 71.6 180 top
R8  Res_0402  [L1077C]  78.5 62 270 top
R9  Res_0402  [L1077C]  77 62 270 top
R10  Res_0402  [L1077C]  79.7 83.9 270 bottom
R11  Res_0402  [L1077C]  86 166 90 top
R12  Res_0402  [L1077C]  92.5 166 90 top
R13  Res_0402  [L1077C]  79.5 166 90 top
R14  Res_0402  [L1077C]  78.5 115 90 bottom
R15  Res_0402  [L1077C]  73.3 85 270 bottom
R16  Res_0402  [L1077C]  112 166 90 top
R17  Res_0402  [L1077C]  112 115 90 bottom
R18  Res_0402  [L1077C]  41 81 180 bottom
R19  Res_0402  [L1077C]  99 166 90 top
R20  Res_0402  [L1077C]  105.5 166 90 top
R21  Res_0402  [L1077C]  42.5 93.5 0 bottom
R22  Res_0402  [L1077C]  45.55 83.65 270 top
R25  Res_0402  [L1077C]  70.9 71.5 180 bottom
R26  Res_0402  [L1077C]  45.75 68.5 0 bottom
R31  Res_0402  [L1077C]  17 78.8 90 top
R32  Res_0402  [L1077C]  35.5 72 90 bottom
R33  Res_0402  [L1077C]  18.5 78.8 270 top
R34  Res_0402  [L1077C]  72.5 69.7 90 bottom
R35  Res_0402  [L1077C]  69 77.9 0 bottom
R36  Res_0402  [L1077C]  75 85 270 bottom
R37  Res_0402  [L1077C]  95.8 49.3 180 bottom
R38  Res_0402  [L1077C]  97.5 52 270 bottom
R39  Res_0402  [L1077C]  88.3 48.3 270 bottom
R40  Res_0402  [L1077C]  93 47.6 180 bottom
R41  Res_0402  [L1077C]  96 52 90 bottom
R42  Res_0402  [L1077C]  92.5 68.5 0 top
R43  Res_0402  [L1077C]  92.5 69.6 0 top
R44  Res_0402  [L1077C]  95 40 270 bottom
R45  Res_0402  [L1077C]  85 64.5 270 bottom
R46  Res_0402  [L1077C]  93.5 40 90 bottom
R47  Res_0402  [L1077C]  83.5 64.5 90 bottom
R48  Res_0402  [L1077C]  103.5 100.5 90 top
R49  Res_0402  [L1077C]  101.5 100.5 90 top
R50  Res_0402  [L1077C]  71.5 74.4 0 bottom
R51  Res_0402  [L1077C]  96.62 76.5 90 bottom
R52  Res_0402  [L1077C]  74.5 64.5 90 bottom
R53  Res_0402  [L1077C]  46.5 46.2 0 top
R54  Res_0402  [L1077C]  45 48.25 270 bottom
R55  Res_0402  [L1077C]  105.5 89.5 90 top
R56  Res_0402  [L1077C]  120.5 73 90 top
R57  Res_0402  [L1077C]  54 89 90 bottom
R58  Res_0402  [L1077C]  67.7 83.7 270 top
R59  Res_0402  [L1077C]  54 86 90 bottom
R61  Res_0402  [L1077C]  114 70 90 top
R62  Res_0402  [L1077C]  114 80.5 0 top
R64  Res_0402  [L1077C]  132.75 146.5 0 top
R65  Res_0402  [L1077C]  132.75 144 0 top
R66  Res_0402  [L1077C]  132.75 141.5 0 top
R68  Res_0402  [L1077C]  132.75 134 0 top
R69  Res_0402  [L1077C]  132.75 131.5 0 top
R70  Res_0402  [L1077C]  132.75 129 0 top
R73  Res_0402  [L1077C]  132.5 111.25 0 top
R74  Res_0402  [L1077C]  132.5 108.75 0 top
R79  Res_0402  [L1077C]  118.2 43.5 0 top
R80  Res_0402  [L1077C]  147.5 36.5 270 top
R83  Res_0402  [L1077C]  125.5 36.5 90 top
R84  Res_0402  [L1077C]  121 31.5 180 top
R85  Res_0402  [L1077C]  114.5 39.5 90 top
R86  Res_0402  [L1077C]  116 39.5 270 top
R87  Res_0402  [L1077C]  149 36.5 90 top
R88  Res_0402  [L1077C]  126.5 89.5 90 top
R89  Res_0402  [L1077C]  123 89.5 90 top
R90  Res_0402  [L1077C]  121.5 89.5 90 top
R91  Res_0402  [L1077C]  112.5 89.5 90 top
R92  Res_0402  [L1077C]  111 89.5 90 top
R93  Res_0402  [L1077C]  129 89.5 90 top
R96  Res_0402  [L1077C]  183.25 64.75 90 top
R97  Res_0402  [L1077C]  183.25 56.25 90 top
R98  Res_0402  [L1077C]  188.5 42.25 0 top
R99  Res_0402  [L1077C]  188.5 45.75 0 top
R100  Res_0402  [L1077C]  188.5 49.25 0 top
R101  Res_0402  [L1077C]  188.5 52.75 0 top
R102  Res_0402  [L1077C]  179.1 93.4 270 bottom
R103  Res_0402  [L1077C]  179.7 87.6 270 bottom
R129  Res_0402  [L1077C]  124.5 166 90 top
R131  Res_0402  [L1077C]  157.25 127.5 270 bottom
R179  Res_0402  [L1077C]  41 79.5 180 bottom
R180  Res_0402  [L1077C]  41 78 180 bottom
R182  Res_0402  [L1077C]  132.5 106.25 0 top
R183  Res_0402  [L1077C]  132.5 103.75 0 top
R184  Res_0402  [L1077C]  150.5 36.5 270 top
R185  Res_0402  [L1077C]  98.5 42 0 bottom
R188  Res_0402  [L1077C]  139 164 270 top
R190  Res_0402  [L1077C]  137.25 164 90 top
R191  Res_0402  [L1077C]  139 166.75 90 top
R193  Res_0402  [L1077C]  34.85 82.95 270 top
R194  Res_0402  [L1077C]  80.25 95.75 0 bottom
R195  Res_0402  [L1077C]  16.55 35.8 270 top
R196  Res_0402  [L1077C]  35.3 43.4 270 top
R197  Res_0402  [L1077C]  20.55 44.9 180 top
R198  Res_0402  [L1077C]  34.05 43.4 90 top
R200  Res_0402  [L1077C]  32.8 38.15 270 top
R201  Res_0402  [L1077C]  31.5 38.15 270 top
R202  Res_0402  [L1077C]  29.55 38.15 270 top
R203  Res_0402  [L1077C]  28.25 38.15 270 top
R205  Res_0402  [L1077C]  18.9 40.95 270 top
R206  resistor_0603  [L1050C]  23.55 23.65 90 bottom
R207  resistor_0603  [L1050C]  27.05 23.65 90 bottom
R208  resistor_0603  [L1050C]  31.8 23.65 90 bottom
R209  resistor_0603  [L1050C]  35.05 23.65 90 bottom
R210  Res_0402  [L1077C]  21.3 38.15 90 top
R211  Res_0402  [L1077C]  22.6 38.15 90 top
R212  Res_0402  [L1077C]  24.8 38.15 90 top
R213  Res_0402  [L1077C]  26.1 38.15 90 top
R214  Res_0402  [L1077C]  20.55 47.9 0 top
R215  Res_0402  [L1077C]  20.55 49.15 180 top
R216  Res_0402  [L1077C]  29.25 55.2 90 top
R217  Res_0402  [L1077C]  30.68 55.2 90 top
R218  Res_0402  [L1077C]  31.82 55.2 90 top
R219  Res_0402  [L1077C]  65.5 83.12 180 top
R220  Res_0402  [L1077C]  27.6 54.4 180 top
R221  Res_0402  [L1077C]  34.55 45.15 0 top
R223  Res_0402  [L1077C]  35.2 57.48 270 top
R224  Res_0402  [L1077C]  35.2 55.23 270 top
R225  Res_0402  [L1077C]  21.1 53.45 270 top
R226  Res_0402  [L1077C]  33.52 57.48 270 top
R227  Res_0402  [L1077C]  33.52 55.23 270 top
R229  Res_0402  [L1077C]  17 44 0 bottom
R230  Res_0402  [L1077C]  43.55 35.8 270 top
R231  Res_0402  [L1077C]  62.3 43.4 270 top
R232  Res_0402  [L1077C]  47.55 44.9 180 top
R233  Res_0402  [L1077C]  61.05 43.4 90 top
R235  Res_0402  [L1077C]  59.8 38.15 270 top
R236  Res_0402  [L1077C]  58.5 38.15 270 top
R237  Res_0402  [L1077C]  56.55 38.15 270 top
R238  Res_0402  [L1077C]  55.25 38.15 270 top
R239  Res_0402  [L1077C]  45.9 40.95 270 top
R240  resistor_0603  [L1050C]  50.55 23.65 90 bottom
R241  resistor_0603  [L1050C]  54.05 23.65 90 bottom
R242  resistor_0603  [L1050C]  58.8 23.65 90 bottom
R243  resistor_0603  [L1050C]  62.05 23.65 90 bottom
R244  Res_0402  [L1077C]  48.3 38.15 90 top
R245  Res_0402  [L1077C]  49.6 38.15 90 top
R246  Res_0402  [L1077C]  51.8 38.15 90 top
R247  Res_0402  [L1077C]  53.1 38.15 90 top
R248  Res_0402  [L1077C]  47.55 47.9 0 top
R249  Res_0402  [L1077C]  47.55 49.15 180 top
R250  Res_0402  [L1077C]  56.25 55.2 90 top
R251  Res_0402  [L1077C]  57.67 55.2 90 top
R252  Res_0402  [L1077C]  58.83 55.2 90 top
R254  Res_0402  [L1077C]  54.6 54.4 180 top
R255  Res_0402  [L1077C]  48.1 53.45 270 top
R256  Res_0402  [L1077C]  61.55 45.15 0 top
R258  Res_0402  [L1077C]  62.2 57.48 270 top
R259  Res_0402  [L1077C]  62.2 55.23 270 top
R260  Res_0402  [L1077C]  44 44 0 bottom
R261  Res_0402  [L1077C]  60.52 57.48 270 top
R262  Res_0402  [L1077C]  60.52 55.23 270 top
R263  Res_1210  [L1053]  173.25 150 270 top
R264  Res_1210  [L1053]  177 150 270 top
R265  Res_0402  [L1077C]  152.75 105.25 180 bottom
R266  Res_0603s  [L1050C]  166 151 90 top
R267  Res_0402  [L1077C]  155.5 99.5 270 bottom
R268  0402  [L1077C]  158.75 157.75 0 top
R269  Res_0402  [L1077C]  154.25 99.5 90 bottom
R270  Res_0402  [L1077C]  157.25 99.5 270 bottom
R271  Res_0402  [L1077C]  20.5 115.25 270 bottom
R272  Res_0402  [L1077C]  152.75 77.25 180 bottom
R273  Res_0402  [L1077C]  26.25 118 0 bottom
R274  Res_0402  [L1077C]  155.5 71.5 270 bottom
R275  Res_0402  [L1077C]  26.25 116.75 180 bottom
R276  Res_0402  [L1077C]  154.25 71.5 90 bottom
R277  Res_0402  [L1077C]  26.25 119.75 0 bottom
R278  Res_0402  [L1077C]  157.25 71.5 270 bottom
R279  Res_0402  [L1077C]  152.75 133.25 180 bottom
R280  Res_0402  [L1077C]  155.5 127.5 270 bottom
R281  Res_0402  [L1077C]  154.25 127.5 90 bottom
R282  Res_0402  [L1077C]  75.17 125.42 270 bottom
R283  Res_0402  [L1077C]  79.38 28.12 180 bottom
R284  Res_0402  [L1077C]  76.17 125.42 270 bottom
R285  Res_0402  [L1077C]  77.38 28.12 180 bottom
R286  Res_0402  [L1077C]  120.62 118.88 0 bottom
R287  Res_0402  [L1077C]  122.62 118.88 0 bottom
R288  Res_0402  [L1077C]  18.2 48.5 90 top
R289  Res_0402  [L1077C]  122.5 124.5 0 bottom
R290  Res_0402  [L1077C]  180.12 12.12 270 top
R291  Res_0402  [L1077C]  177.5 12.12 90 top
R292  0805  [L1051]  168 102.5 90 top
R293  0805  [L1051]  23.25 130.5 180 top
R294  0805  [L1051]  168 74.5 90 top
R295  0805  [L1051]  168 130.5 90 top
R296  Res_0402  [L1077C]  74.17 125.42 270 bottom
R297  Res_0402  [L1077C]  75.5 131.5 180 bottom
R298  Res_0402  [L1077C]  77.5 22.5 0 bottom
RN1  RNET_0402x4_convex  [L1091D]  66.2 68.5 90 top
RN2  RNET_0402x4_convex  [L1091D]  75 62 180 top
RN3  RNET_0402x4_convex  [L1091D]  65 76.1 90 top
RN4  RNET_0402x4_convex  [L1091D]  56.1 76.6 90 top
RN5  RNET_0402x4_convex  [L1091D]  65 79.4 90 top
RN6  RNET_0402x4_convex  [L1091D]  56.1 79.6 90 top
RN7  RNET_0402x4_convex  [L1091D]  65 76.1 270 bottom
RN8  RNET_0402x4_convex  [L1091D]  65 79.4 270 bottom
RN9  RNET_0402x4_convex  [L1091D]  53.6 76.6 270 top
RN10  RNET_0402x4_convex  [L1091D]  53.6 79.6 270 top
RN11  RNET_0402x4_convex  [L1091D]  48 76.5 270 top
RN12  RNET_0402x4_convex  [L1091D]  48 79.5 270 top
RN13  RNET_0402x4_convex  [L1091D]  48 76.5 90 bottom
RN14  RNET_0402x4_convex  [L1091D]  48 79.5 90 bottom
RN15  RNET_0402x4_convex  [L1091D]  92.5 78 270 top
RN16  RNET_0402x4_convex  [L1091D]  92.5 67.5 90 bottom
RN17  RNET_0402x4_convex  [L1091D]  92.5 73.5 90 bottom
RN18  RNET_0402x4_convex  [L1091D]  92.5 70.5 90 bottom
RN19  RNET_0402x4_convex  [L1091D]  92.5 72 270 top
RN20  RNET_0402x4_convex  [L1091D]  92.5 75 270 top
RN21  RNET_0402x4_convex  [L1091D]  117.5 67.5 0 top
RN22  RNET_0402x4_convex  [L1091D]  111.5 67.5 0 top
RN23  RNET_0805  [L1091D]  38 53.6 180 top
RN24  RNET_0805  [L1091D]  34.3 47.4 90 top
RN25  RNET_0805  [L1091D]  65 53.6 180 top
RN26  RNET_0805  [L1091D]  61.3 47.4 90 top
SW1  Switch_DIL_8_SPST_Omron_A6E  [L6015]  135.75 146.5 0 top
SW2  Switch_DIL_4_SPST_Omron_A6E  [L6018]  135.5 111.25 0 top
SW3  Switch_SMT_Pbutton_SPST_4pad  [L6047]  189.5 66.5 0 top
SW4  Switch_SMT_Pbutton_SPST_4pad  [L6047]  189.5 58 0 top
SW13  Switch_SMT_Pbutton_SPST_4pad  [L6047]  145.25 166 0 top
SW14  PCB_Toggle_RA_SPDT_FAR1524245  [L6265]  158.88 163.38 270 top
T3  BC849C_NPN_SOT23  [L3503G]  115 35.5 0 top
T8  BCP69T1_PNP_SOT223_4  [L3602N]  38.05 48.65 90 bottom
T9  BCP69T1_PNP_SOT223_4  [L3602N]  65.05 48.65 90 bottom
T10  SUM55P06-19L  [L3564A]  156.75 151.25 90 top
TH1  Thermistor_0805  [L1051]  110.5 33 0 top
TR1  NDT452AP  [L3602I]  121 37.5 0 top
X1  8mmx4.5mm Crystal  [L3112]  49 89 90 bottom

## Library data of the parts
C1 C3 C6 C8 C49 C111 C117 C122-C125 C128-C133 C147 C164 C171 C172 C177 C189 C196 C202 C234 = CAP_CER_0805
C2 C4 C5 C7 C9-C27 C30-C48 = CAP_CER_0201_round: signal model: CAP_CER_0201_ROUND_L2058_CAP_CE_CAP_CER_0201_round
C50-C53 C60-C77 C79 C82 C83 C85 C86 C91 C95-C99 = CAP_CER_0402s: signal model: CAP_CER_0402S_L1077C_CAP_CER__1_CAP_CER_0402s
C56 C78 C80 C102 C114 C119 C126 C209 C216 C227 C228 C235 = CAP_CER_0603s
C88 = CAP_POL__SMT_PANASONIC_CASE_C
C127 C144-C146 C148 C149 C151-C163 C165-C170 C173-C176 C178 C179 C181-C188 C190-C195 C197-C201 C203 C236-C239 = CAP_CER_0402s
C134-C143 = CAP_CER_0201_round
C150 C180 C210-C212 C214 C215 C217-C226 C229-C233 = CAP_CER_1206
C204-C208 = CAP_POL_SMT_PANASONIC_HC_D8
C213 = CAP_POL_RAD_PD100LP050LD06
CONN1 CONN2 = SATA_STD_Molex_67490_1220
D1-D6 D9-D13 D15-D20 = LED_CHIP_SMT_0603_KP1608
D14 = BZX84C3V3_SOT23
D21-D24 = Schottky_SMC
F1 = Fuse_0805_Poly
FB1-FB6 = FERRITE_SMT_0603
FID1-FID12 = ALS_FID
HD3 = Header_32x2_2.54mm_unshroud_TH
HD4 = Header_3x1_TH
HD5 = HEADER_10x2_Shrouded_TH
HD6 = Kycon_KPJX_4S_S_PowerConn
IC1 = NAS7825
IC2 = ICS841S04I_TSSOP24
IC5 = DDR2_2Gb_16Mx16x8_84FBGA
IC7 = SN74CB3T3257DGV_TVSOP16
IC11 = NAND_ONFI1_TSOP48
IC15 = ISL83220ECVZ_TSSOP16
IC16 IC17 = IP1001
IC18-IC21 = AOZ1014DI_DFN8_4x5
IC22 = AP7165_FNG_7_DFN3030_10
IC23 IC24 = AP7167_FNG_7_DFN3030_10
JP1-JP3 = JUMPER
L1-L5 = IND_WURTH_WE_TPC_T
L6 L7 L9 = IND_COILTRONICS_DR127
L8 = IND_SMT_EPCOS_B82464Z4xxxx
MAG1 MAG2 = H5007
OSC1 OSC2 = 7mmx5mmosc_b
P1 P2 = x1_PCI_Express_Mini_Card
P3 = USB_type_B
P5 = USB_type_A_TH
P7 = DSUB_9_MALE_90DEG_US_v2
P11 P12 = RJ45_TOBY_3012S
PWR1 PWR2 = Power_Lead_attache_2x2
R1-R22 R25 R26 R31-R52 R56 R57 R59 R61 R62 R64-R66 R68-R70 R73 R74 R79 R80 R83-R93 R96-R103 R129 R131 = Res_0402s: signal model: RES_0402S_L1077C_RES_0402_Res_0402
R53-R55 R58 R179 R180 R182-R185 R188 R190 R191 R193-R198 R200-R203 R205 R210-R221 R223-R227 R229-R233 R235-R239 R244-R252 R254-R256 R258-R262 R265 R267-R291 R296-R298 = Res_0402s
R206-R209 R240-R243 R266 = Res_0603s
R263 R264 = Res_1210
R292-R295 = Res_0805
RN1-RN22 = RNET_0402x4_convex: signal model: RNET_0402X4_CONVEX_L1091D_RNET__RNET_0402x4_convex
RN23-RN26 = RNET_0805
SW1 = Switch_DIL_8_SPST_Omron_A6E
SW2 = Switch_DIL_4_SPST_Omron_A6E
SW3 SW4 SW13 = Switch_SMT_Pbutton_SPST_4pad
SW14 = PCB_Toggle_RA_SPDT_FAR1524245
T3 = BC849C_NPN_SOT23
T8 T9 = BCP69T1_PNP_SOT223_4
T10 = SUM55P06-19L
TH1 = Thermistor_0805
TR1 = NDT452AP_PMOS_SOT223
X1 = 8mmx4.5mm Crystal

## Footprints (pads in the part's own frame, mm; a bottom-side part is the same pattern mirrored in y, then rotated)
ALS_FID
  round 1.016 smd: 1(0,0)
L0107
  rect 0.5x1.15 smd: 1(-1.425,-1.812) 2(-0.475,-1.812) 3(0.475,-1.812) 4(1.425,-1.812)
  rect 0.5x0.9 smd: 5(1.425,1.912) 6(0.475,1.912) 7(-0.475,1.912) 8(-1.425,1.912)
  rect 1.875x2.3 smd: 9(1.238,0.112)
  rect 2.225x2.75 smd: 10(-1.112,0.338)
L0363C
  round 0.356 smd: A1(-3.2,5.601) A2(-2.4,5.601) A3(-1.6,5.601) A7(1.6,5.601) A8(2.4,5.601) A9(3.2,5.601) B1(-3.2,4.801) B2(-2.4,4.801) B3(-1.6,4.801) B7(1.6,4.801) B8(2.4,4.801) B9(3.2,4.801) C1(-3.2,4) C2(-2.4,4) C3(-1.6,4) C7(1.6,4) C8(2.4,4) C9(3.2,4) D1(-3.2,3.2) D2(-2.4,3.2) D3(-1.6,3.2) D7(1.6,3.2) D8(2.4,3.2) D9(3.2,3.2) E1(-3.2,2.4) E2(-2.4,2.4) E3(-1.6,2.4) E7(1.6,2.4) E8(2.4,2.4) E9(3.2,2.4) F1(-3.2,1.6) F2(-2.4,1.6) F3(-1.6,1.6) F7(1.6,1.6) F8(2.4,1.6) F9(3.2,1.6) G1(-3.2,0.8) G2(-2.4,0.8) G3(-1.6,0.8) G7(1.6,0.8) G8(2.4,0.8) G9(3.2,0.8) H1(-3.2,0) H2(-2.4,0) H3(-1.6,0) H7(1.6,0) H8(2.4,0) H9(3.2,0) J1(-3.2,-0.8) J2(-2.4,-0.8) J3(-1.6,-0.8) J7(1.6,-0.8) J8(2.4,-0.8) J9(3.2,-0.8) K2(-2.4,-1.6) K3(-1.6,-1.6) K7(1.6,-1.6) K8(2.4,-1.6) K9(3.2,-1.6) L1(-3.2,-2.4) L2(-2.4,-2.4) L3(-1.6,-2.4) L7(1.6,-2.4) L8(2.4,-2.4) M2(-2.4,-3.2) M3(-1.6,-3.2) M7(1.6,-3.2) M8(2.4,-3.2) M9(3.2,-3.2) N1(-3.2,-4) N2(-2.4,-4) N3(-1.6,-4) N7(1.6,-4) N8(2.4,-4) P2(-2.4,-4.801) P3(-1.6,-4.801) P7(1.6,-4.801) P8(2.4,-4.801) P9(3.2,-4.801) R1(-3.2,-5.601) R2(-2.4,-5.601) R3(-1.6,-5.601) R7(1.6,-5.601) R8(2.4,-5.601)
L0414
  round 0.457 smd: A1(-7.501,-7.501) A2(-7.501,-6.5) A3(-7.501,-5.499) A4(-7.501,-4.501) A5(-7.501,-3.5) A6(-7.501,-2.499) A7(-7.501,-1.501) A8(-7.501,-0.5) A9(-7.501,0.5) A10(-7.501,1.501) A11(-7.501,2.499) A12(-7.501,3.5) A13(-7.501,4.501) A14(-7.501,5.499) A15(-7.501,6.5) A16(-7.501,7.501) B1(-6.5,-7.501) B2(-6.5,-6.5) B3(-6.5,-5.499) B4(-6.5,-4.501) B5(-6.5,-3.5) B6(-6.5,-2.499) B7(-6.5,-1.501) B8(-6.5,-0.5) B9(-6.5,0.5) B10(-6.5,1.501) B11(-6.5,2.499) B12(-6.5,3.5) B13(-6.5,4.501) B14(-6.5,5.499) B15(-6.5,6.5) B16(-6.5,7.501) C1(-5.499,-7.501) C2(-5.499,-6.5) C3(-5.499,-5.499) C4(-5.499,-4.501) C5(-5.499,-3.5) C6(-5.499,-2.499) C7(-5.499,-1.501) C8(-5.499,-0.5) C9(-5.499,0.5) C10(-5.499,1.501) C11(-5.499,2.499) C12(-5.499,3.5) C13(-5.499,4.501) C14(-5.499,5.499) C15(-5.499,6.5) C16(-5.499,7.501) D1(-4.501,-7.501) D2(-4.501,-6.5) D3(-4.501,-5.499) D4(-4.501,-4.501) D5(-4.501,-3.5) D6(-4.501,-2.499) D7(-4.501,-1.501) D8(-4.501,-0.5) D9(-4.501,0.5) D10(-4.501,1.501) D11(-4.501,2.499) D12(-4.501,3.5) D13(-4.501,4.501) D14(-4.501,5.499) D15(-4.501,6.5) D16(-4.501,7.501) E1(-3.5,-7.501) E2(-3.5,-6.5) E3(-3.5,-5.499) E4(-3.5,-4.501) E5(-3.5,-3.5) E6(-3.5,-2.499) E7(-3.5,-1.501) E8(-3.5,-0.5) E9(-3.5,0.5) E10(-3.5,1.501) E11(-3.5,2.499) E12(-3.5,3.5) E13(-3.5,4.501) E14(-3.5,5.499) E15(-3.5,6.5) E16(-3.5,7.501) F1(-2.499,-7.501) F2(-2.499,-6.5) F3(-2.499,-5.499) F4(-2.499,-4.501) F5(-2.499,-3.5) F6(-2.499,-2.499) F7(-2.499,-1.501) F8(-2.499,-0.5) F9(-2.499,0.5) F10(-2.499,1.501) F11(-2.499,2.499) F12(-2.499,3.5) F13(-2.499,4.501) F14(-2.499,5.499) F15(-2.499,6.5) F16(-2.499,7.501) G1(-1.501,-7.501) G2(-1.501,-6.5) G3(-1.501,-5.499) G4(-1.501,-4.501) G5(-1.501,-3.5) G6(-1.501,-2.499) G7(-1.501,-1.501) G8(-1.501,-0.5) G9(-1.501,0.5) G10(-1.501,1.501) G11(-1.501,2.499) G12(-1.501,3.5) G13(-1.501,4.501) G14(-1.501,5.499) G15(-1.501,6.5) G16(-1.501,7.501) H1(-0.5,-7.501) H2(-0.5,-6.5) H3(-0.5,-5.499) H4(-0.5,-4.501) H5(-0.5,-3.5) H6(-0.5,-2.499) H7(-0.5,-1.501) H8(-0.5,-0.5) H9(-0.5,0.5) H10(-0.5,1.501) H11(-0.5,2.499) H12(-0.5,3.5) H13(-0.5,4.501) H14(-0.5,5.499) H15(-0.5,6.5) H16(-0.5,7.501) J1(0.5,-7.501) J2(0.5,-6.5) J3(0.5,-5.499) J4(0.5,-4.501) J5(0.5,-3.5) J6(0.5,-2.499) J7(0.5,-1.501) J8(0.5,-0.5) J9(0.5,0.5) J10(0.5,1.501) J11(0.5,2.499) J12(0.5,3.5) J13(0.5,4.501) J14(0.5,5.499) J15(0.5,6.5) J16(0.5,7.501) K1(1.501,-7.501) K2(1.501,-6.5) K3(1.501,-5.499) K4(1.501,-4.501) K5(1.501,-3.5) K6(1.501,-2.499) K7(1.501,-1.501) K8(1.501,-0.5) K9(1.501,0.5) K10(1.501,1.501) K11(1.501,2.499) K12(1.501,3.5) K13(1.501,4.501) K14(1.501,5.499) K15(1.501,6.5) K16(1.501,7.501) L1(2.499,-7.501) L2(2.499,-6.5) L3(2.499,-5.499) L4(2.499,-4.501) L5(2.499,-3.5) L6(2.499,-2.499) L7(2.499,-1.501) L8(2.499,-0.5) L9(2.499,0.5) L10(2.499,1.501) L11(2.499,2.499) L12(2.499,3.5) L13(2.499,4.501) L14(2.499,5.499) L15(2.499,6.5) L16(2.499,7.501) M1(3.5,-7.501) M2(3.5,-6.5) M3(3.5,-5.499) M4(3.5,-4.501) M5(3.5,-3.5) M6(3.5,-2.499) M7(3.5,-1.501) M8(3.5,-0.5) M9(3.5,0.5) M10(3.5,1.501) M11(3.5,2.499) M12(3.5,3.5) M13(3.5,4.501) M14(3.5,5.499) M15(3.5,6.5) M16(3.5,7.501) N1(4.501,-7.501) N2(4.501,-6.5) N3(4.501,-5.499) N4(4.501,-4.501) N5(4.501,-3.5) N6(4.501,-2.499) N7(4.501,-1.501) N8(4.501,-0.5) N9(4.501,0.5) N10(4.501,1.501) N11(4.501,2.499) N12(4.501,3.5) N13(4.501,4.501) N14(4.501,5.499) N15(4.501,6.5) N16(4.501,7.501) P1(5.499,-7.501) P2(5.499,-6.5) P3(5.499,-5.499) P4(5.499,-4.501) P5(5.499,-3.5) P6(5.499,-2.499) P7(5.499,-1.501) P8(5.499,-0.5) P9(5.499,0.5) P10(5.499,1.501) P11(5.499,2.499) P12(5.499,3.5) P13(5.499,4.501) P14(5.499,5.499) P15(5.499,6.5) P16(5.499,7.501) R1(6.5,-7.501) R2(6.5,-6.5) R3(6.5,-5.499) R4(6.5,-4.501) R5(6.5,-3.5) R6(6.5,-2.499) R7(6.5,-1.501) R8(6.5,-0.5) R9(6.5,0.5) R10(6.5,1.501) R11(6.5,2.499) R12(6.5,3.5) R13(6.5,4.501) R14(6.5,5.499) R15(6.5,6.5) R16(6.5,7.501) T1(7.501,-7.501) T2(7.501,-6.5) T3(7.501,-5.499) T4(7.501,-4.501) T5(7.501,-3.5) T6(7.501,-2.499) T7(7.501,-1.501) T8(7.501,-0.5) T9(7.501,0.5) T10(7.501,1.501) T11(7.501,2.499) T12(7.501,3.5) T13(7.501,4.501) T14(7.501,5.499) T15(7.501,6.5) T16(7.501,7.501)
L0563
  rect 0.356x1.778 smd: 1(-3.576,-2.921) 2(-2.926,-2.921) 3(-2.276,-2.921) 4(-1.626,-2.921) 5(-0.975,-2.921) 6(-0.325,-2.921) 7(0.325,-2.921) 8(0.975,-2.921) 9(1.626,-2.921) 10(2.276,-2.921) 11(2.926,-2.921) 12(3.576,-2.921) 13(3.576,2.921) 14(2.926,2.921) 15(2.276,2.921) 16(1.626,2.921) 17(0.975,2.921) 18(0.325,2.921) 19(-0.325,2.921) 20(-0.975,2.921) 21(-1.626,2.921) 22(-2.276,2.921) 23(-2.926,2.921) 24(-3.576,2.921)
L0571
  rect 0.279x1.524 smd: 1(-5.753,-9.703) 2(-5.253,-9.703) 3(-4.752,-9.703) 4(-4.252,-9.703) 5(-3.752,-9.703) 6(-3.251,-9.703) 7(-2.751,-9.703) 8(-2.25,-9.703) 9(-1.75,-9.703) 10(-1.25,-9.703) 11(-0.749,-9.703) 12(-0.249,-9.703) 13(0.251,-9.703) 14(0.752,-9.703) 15(1.252,-9.703) 16(1.753,-9.703) 17(2.253,-9.703) 18(2.753,-9.703) 19(3.254,-9.703) 20(3.754,-9.703) 21(4.254,-9.703) 22(4.755,-9.703) 23(5.255,-9.703) 24(5.756,-9.703) 25(5.756,9.703) 26(5.255,9.703) 27(4.755,9.703) 28(4.254,9.703) 29(3.754,9.703) 30(3.254,9.703) 31(2.753,9.703) 32(2.253,9.703) 33(1.753,9.703) 34(1.252,9.703) 35(0.752,9.703) 36(0.251,9.703) 37(-0.249,9.703) 38(-0.749,9.703) 39(-1.25,9.703) 40(-1.75,9.703) 41(-2.25,9.703) 42(-2.751,9.703) 43(-3.251,9.703) 44(-3.752,9.703) 45(-4.252,9.703) 46(-4.752,9.703) 47(-5.253,9.703) 48(-5.753,9.703)
L0598
  rect 0.356x1.778 smd: 1(-2.276,-2.921) 2(-1.626,-2.921) 3(-0.975,-2.921) 4(-0.325,-2.921) 5(0.325,-2.921) 6(0.975,-2.921) 7(1.626,-2.921) 8(2.276,-2.921) 9(2.276,2.921) 10(1.626,2.921) 11(0.975,2.921) 12(0.325,2.921) 13(-0.325,2.921) 14(-0.975,2.921) 15(-1.626,2.921) 16(-2.276,2.921)
L0680E
  oval 0.85x0.3 smd: 1(-4.45,3.75) 2(-4.45,3.25) 3(-4.45,2.75) 4(-4.45,2.25) 5(-4.45,1.75) 6(-4.45,1.25) 7(-4.45,0.75) 8(-4.45,0.25) 9(-4.45,-0.25) 10(-4.45,-0.75) 11(-4.45,-1.25) 12(-4.45,-1.75) 13(-4.45,-2.25) 14(-4.45,-2.75) 15(-4.45,-3.25) 16(-4.45,-3.75) 33(4.45,-3.75) 34(4.45,-3.25) 35(4.45,-2.75) 36(4.45,-2.25) 37(4.45,-1.75) 38(4.45,-1.25) 39(4.45,-0.75) 40(4.45,-0.25) 41(4.45,0.25) 42(4.45,0.75) 43(4.45,1.25) 44(4.45,1.75) 45(4.45,2.25) 46(4.45,2.75) 47(4.45,3.25) 48(4.45,3.75)
  oval 0.3x0.85 smd: 17(-3.75,-4.45) 18(-3.25,-4.45) 19(-2.75,-4.45) 20(-2.25,-4.45) 21(-1.75,-4.45) 22(-1.25,-4.45) 23(-0.75,-4.45) 24(-0.25,-4.45) 25(0.25,-4.45) 26(0.75,-4.45) 27(1.25,-4.45) 28(1.75,-4.45) 29(2.25,-4.45) 30(2.75,-4.45) 31(3.25,-4.45) 32(3.75,-4.45) 49(3.75,4.45) 50(3.25,4.45) 51(2.75,4.45) 52(2.25,4.45) 53(1.75,4.45) 54(1.25,4.45) 55(0.75,4.45) 56(0.25,4.45) 57(-0.25,4.45) 58(-0.75,4.45) 59(-1.25,4.45) 60(-1.75,4.45) 61(-2.25,4.45) 62(-2.75,4.45) 63(-3.25,4.45) 64(-3.75,4.45)
  rect 5.75x5.75 smd: 65(0,0)
L0808
  rect 0.229x1.397 smd: 1(-1.394,-2.984) 2(-0.996,-2.984) 3(-0.597,-2.984) 4(-0.198,-2.984) 5(0.201,-2.984) 6(0.599,-2.984) 7(0.998,-2.984) 8(1.397,-2.984) 9(1.397,2.984) 10(0.998,2.984) 11(0.599,2.984) 12(0.201,2.984) 13(-0.198,2.984) 14(-0.597,2.984) 15(-0.996,2.984) 16(-1.394,2.984)
L0873
  rect 0.66x0.254 smd: 1(-1.425,1) 2(-1.425,0.5) 3(-1.425,0) 4(-1.425,-0.5) 5(-1.425,-1) 6(1.425,-1) 7(1.425,-0.5) 8(1.425,0) 9(1.425,0.5) 10(1.425,1)
  rect 1.575x2.362 smd: 11(0,0)
L1050C
  rect 0.889x1.016 smd: 1(-0.724,0) 2(0.724,0)
L1051
  rect 0.95x1.45 smd: 1(-1,0) 2(1,0)
L1053
  rect 1.6x2.692 smd: 1(-1.4,0) 2(1.4,0)
L1077C
  rect 0.65x0.65 smd: 1(-0.45,0) 2(0.45,0)
L1091D
  rect 0.406x0.508 smd: 1(-0.805,-0.508) 4(0.805,-0.508) 5(0.805,0.508) 8(-0.805,0.508)
  rect 0.279x0.508 smd: 2(-0.251,-0.508) 3(0.251,-0.508) 6(0.251,0.508) 7(-0.251,0.508)
L2050C
  rect 0.889x1.016 smd: 1(-0.724,0) 2(0.724,0)
L2051
  rect 1.15x1.45 smd: 1(-0.9,0) 2(0.9,0)
L2052
  rect 1.6x1.803 smd: 1(-1.4,0) 2(1.4,0)
L2058
  round 0.305 smd: 1(-0.274,0) 2(0.274,0)
L2117A
  rect 3.2x1.6 smd: 1(-2.388,0) 2(2.388,0)
L2120A
  round 1.905 hole 0.889: 1(0,0) 2(5.004,0)
L2124
  rect 2.794x1.6 smd: 1(-2.146,0) 2(2.146,0)
L3008
  rect 1.778x2.007 smd: 1(-2.54,-2.096) 2(2.54,-2.096) 3(2.54,2.096) 4(-2.54,2.096)
L3112
  rect 2.489x2.794 smd: 1(-3.251,0) 2(3.251,0)
L3503G
  rect 0.889x1.397 smd: 1(0.952,1.105) 2(-0.952,1.105) 3(0,-1.105)
L3552D
  rect 2.794x3.81 smd: 1(-3.556,0) 2(3.556,0)
L3564A
  rect 11.43x8.89 smd: D(0,5.715)
  rect 2.286x3.81 smd: G(-2.54,-5.715) S(2.54,-5.715)
L3602I
  rect 1.092x2.184 smd: 1(-2.299,-3.099) 2(0,-3.099) 3(2.299,-3.099)
  rect 3.505x2.21 smd: 4(0,3.099)
L3602N
  rect 1.092x2.184 smd: 1(-2.299,-3.099) 2(0,-3.099) 3(2.299,-3.099)
  rect 3.505x2.21 smd: 4(0,3.099)
L3631C
  rect 1.092x0.991 smd: 1(0.851,0) 2(-0.851,0)
L3790G
  rect 0.787x0.889 smd: 1(0.94,1.003) 2(-0.94,1.003) 3(0,-1.003)
L4139
  rect 0.762x1.905 smd: 1(-6.985,-7.302) 2(-5.715,-7.302) 3(-4.445,-7.302) 4(-3.175,-7.302) 5(-1.905,-7.302) 6(-0.635,-7.302) 7(0.635,-7.302) 8(1.905,-7.302) 9(3.175,-7.302) 10(4.445,-7.302) 11(5.715,-7.302) 12(6.985,-7.302) 13(6.985,7.302) 14(5.715,7.302) 15(4.445,7.302) 16(3.175,7.302) 17(1.905,7.302) 18(0.635,7.302) 19(-0.635,7.302) 20(-1.905,7.302) 21(-3.175,7.302) 22(-4.445,7.302) 23(-5.715,7.302) 24(-6.985,7.302)
L4598
  rect 0.889x1.016 smd: 1(-0.724,0) 2(0.724,0)
L4819
  rect 2.667x3.607 smd: 1(-4.153,0) 2(4.153,0)
L4824
  rect 3.861x5.486 smd: 1(-4.976,0) 2(4.976,0)
L4878
  rect 1.3x0.65 smd: 1(0,1.376) 2(0,-1.376)
L6015
  rect 1.524x1.524 hole 0.889: 1(0,0)
  round 1.524 hole 0.889: 2(0,-2.54) 3(0,-5.08) 4(0,-7.62) 5(0,-10.16) 6(0,-12.7) 7(0,-15.24) 8(0,-17.78) 9(7.62,-17.78) 10(7.62,-15.24) 11(7.62,-12.7) 12(7.62,-10.16) 13(7.62,-7.62) 14(7.62,-5.08) 15(7.62,-2.54) 16(7.62,0)
L6018
  rect 1.524x1.524 hole 0.889: 1(0,0)
  round 1.524 hole 0.889: 2(0,-2.54) 3(0,-5.08) 4(0,-7.62) 5(7.62,-7.62) 6(7.62,-5.08) 7(7.62,-2.54) 8(7.62,0)
L6047
  rect 1.549x1.295 smd: 1(3.975,-2.248) 2(-3.975,-2.248) 3(3.975,2.248) 4(-3.975,2.248)
L6265
  rect 1.1x1.55 smd: (-1.9,4.875) (-1.9,-4.875) (1.9,4.875) (1.9,-4.875)
  rect 1.7x0.7 smd: 4(3.85,1.905) 5(3.85,-0.635) 6(3.85,-3.175)
L7003D1
  round 2.794 hole 3.2 unplated: (-1.27,-6.35) (10.16,-6.35)
  round 1.524 hole 0.889: 1(0,0) 2(1.27,2.54) 3(2.54,0) 4(3.81,2.54) 5(5.08,0) 6(6.35,2.54) 7(7.62,0) 8(8.89,2.54)
  round 2.794 hole 1.575: 9(-3.302,-3.302) 10(12.192,-3.302)
L7473RA
  round 2.54 hole 1.499: (-6.37,-2.362) (6.373,-2.362)
  rect 0.889x2.032 smd: 1(3.81,0) 2(2.54,0) 3(1.27,0) 4(0,0) 5(-1.27,0) 6(-2.54,0) 7(-3.81,0)
L7651A
  round 1.27 hole 1.702 unplated: (-5,-3.5) (0,-3.5)
  oval 1.143x3.048 hole 0.61: 1(-5.4,3.65) 2(0.4,3.65) 3(-5,0) 4(0,0) 5(-10.3,5) 6(5.3,5)
  oval 2.794x1.778 hole 1.016: 7(-2.5,-5.5)
  round 3.048 hole 2.21: 8(-10.3,-3.5) 9(5.3,-3.5)
L8014
  round 1.524 hole 1.016: 1(0,0) 2(0,-2.54)
L8019
  round 1.524 hole 1.016: 1(0,0) 2(0,-2.54) 3(0,-5.08)
L8072A
  rect 1.524x1.524 hole 1.016: 1(0,0)
  round 1.524 hole 1.016: 2(0,2.54) 3(2.54,0) 4(2.54,2.54) 5(5.08,0) 6(5.08,2.54) 7(7.62,0) 8(7.62,2.54) 9(10.16,0) 10(10.16,2.54) 11(12.7,0) 12(12.7,2.54) 13(15.24,0) 14(15.24,2.54) 15(17.78,0) 16(17.78,2.54) 17(20.32,0) 18(20.32,2.54) 19(22.86,0) 20(22.86,2.54)
L8079A
  rect 1.524x1.524 hole 0.889: 1(0,0)
  round 1.524 hole 0.889: 2(0,2.54) 3(2.54,0) 4(2.54,2.54) 5(5.08,0) 6(5.08,2.54) 7(7.62,0) 8(7.62,2.54) 9(10.16,0) 10(10.16,2.54) 11(12.7,0) 12(12.7,2.54) 13(15.24,0) 14(15.24,2.54) 15(17.78,0) 16(17.78,2.54) 17(20.32,0) 18(20.32,2.54) 19(22.86,0) 20(22.86,2.54) 21(25.4,0) 22(25.4,2.54) 23(27.94,0) 24(27.94,2.54) 25(30.48,0) 26(30.48,2.54) 27(33.02,0) 28(33.02,2.54) 29(35.56,0) 30(35.56,2.54) 31(38.1,0) 32(38.1,2.54) 33(40.64,0) 34(40.64,2.54) 35(43.18,0) 36(43.18,2.54) 37(45.72,0) 38(45.72,2.54) 39(48.26,0) 40(48.26,2.54) 41(50.8,0) 42(50.8,2.54) 43(53.34,0) 44(53.34,2.54) 45(55.88,0) 46(55.88,2.54) 47(58.42,0) 48(58.42,2.54) 49(60.96,0) 50(60.96,2.54) 51(63.5,0) 52(63.5,2.54) 53(66.04,0) 54(66.04,2.54) 55(68.58,0) 56(68.58,2.54) 57(71.12,0) 58(71.12,2.54) 59(73.66,0) 60(73.66,2.54) 61(76.2,0) 62(76.2,2.54) 63(78.74,0) 64(78.74,2.54)
L8133A
  rect 1.905x1.905 hole 1.016: 1(0,0)
  round 1.905 hole 1.016: 2(2.743,0) 3(5.486,0) 4(8.23,0) 5(10.973,0) 6(1.372,-2.845) 7(4.115,-2.845) 8(6.858,-2.845) 9(9.601,-2.845)
  round 4.445 hole 3.2: 10(-7.01,-1.422) 11(17.983,-1.422)
L8294
  round 1.524 hole 0.889: 1(0,0) 2(0,2.499) 3(-1.999,2.499) 4(-1.999,0)
  round 3.81 hole 2.286: 5(-4.709,7.269) 6(-4.709,-4.77)
L8794S
  round 1.651 hole 1.016: 1(0,0) 2(2.499,0) 3(4.498,0) 4(6.998,0)
  round 3.81 hole 2.286: 5(-3.068,-2.71) 6(10.071,-2.71)
L8961G
  rect 2.3x3.2 smd: (-14.65,-3.5) (14.65,-3.5)
  round 1.45 hole 1.6 unplated: (-12.5,0)
  round 0.9 hole 1.1 unplated: (12.5,0)
  rect 0.6x2 smd: 1(-11.8,-4.1) 2(-11.4,4.1) 3(-11,-4.1) 4(-10.6,4.1) 5(-10.2,-4.1) 6(-9.8,4.1) 7(-9.4,-4.1) 8(-9,4.1) 9(-8.6,-4.1) 10(-8.2,4.1) 11(-7.8,-4.1) 12(-7.4,4.1) 13(-7,-4.1) 14(-6.6,4.1) 15(-6.2,-4.1) 16(-5.8,4.1) 17(-2.2,-4.1) 18(-1.8,4.1) 19(-1.4,-4.1) 20(-1,4.1) 21(-0.6,-4.1) 22(-0.2,4.1) 23(0.2,-4.1) 24(0.6,4.1) 25(1,-4.1) 26(1.4,4.1) 27(1.8,-4.1) 28(2.2,4.1) 29(2.6,-4.1) 30(3,4.1) 31(3.4,-4.1) 32(3.8,4.1) 33(4.2,-4.1) 34(4.6,4.1) 35(5,-4.1) 36(5.4,4.1) 37(5.8,-4.1) 38(6.2,4.1) 39(6.6,-4.1) 40(7,4.1) 41(7.4,-4.1) 42(7.8,4.1) 43(8.2,-4.1) 44(8.6,4.1) 45(9,-4.1) 46(9.4,4.1) 47(9.8,-4.1) 48(10.2,4.1) 49(10.6,-4.1) 50(11,4.1) 51(11.4,-4.1) 52(11.8,4.1)
L9659
  round 4 hole 2.5: 1(5,0) 2(0,5) 3(5,5) 4(0,0)
unnamed
  round 3.556 hole 3.988 unplated: (0,0)
unnamed#3
  round 1.397 hole 1.549 unplated: (-12.1,0)
  round 0.9 hole 1.1 unplated: (12.1,0)
  rect 1.5x1.9 smd: 1(-12.1,2.75) 4(12.1,2.75)
  rect 1.2x2.7 smd: 2(-13.35,-3.15) 3(-10.85,-3.15) 5(10.85,-3.15) 6(13.35,-3.15)

## Nets
